# Altium PCB board.PcbDoc
Units mm, origin at the board's own origin, x right, y up, seen from the top; angles counter-clockwise.
Board outline 43 x 32 mm, 2 copper layers (Top Layer, Bottom Layer); 85 components, 64 nets, 306 pads, 137 vias.
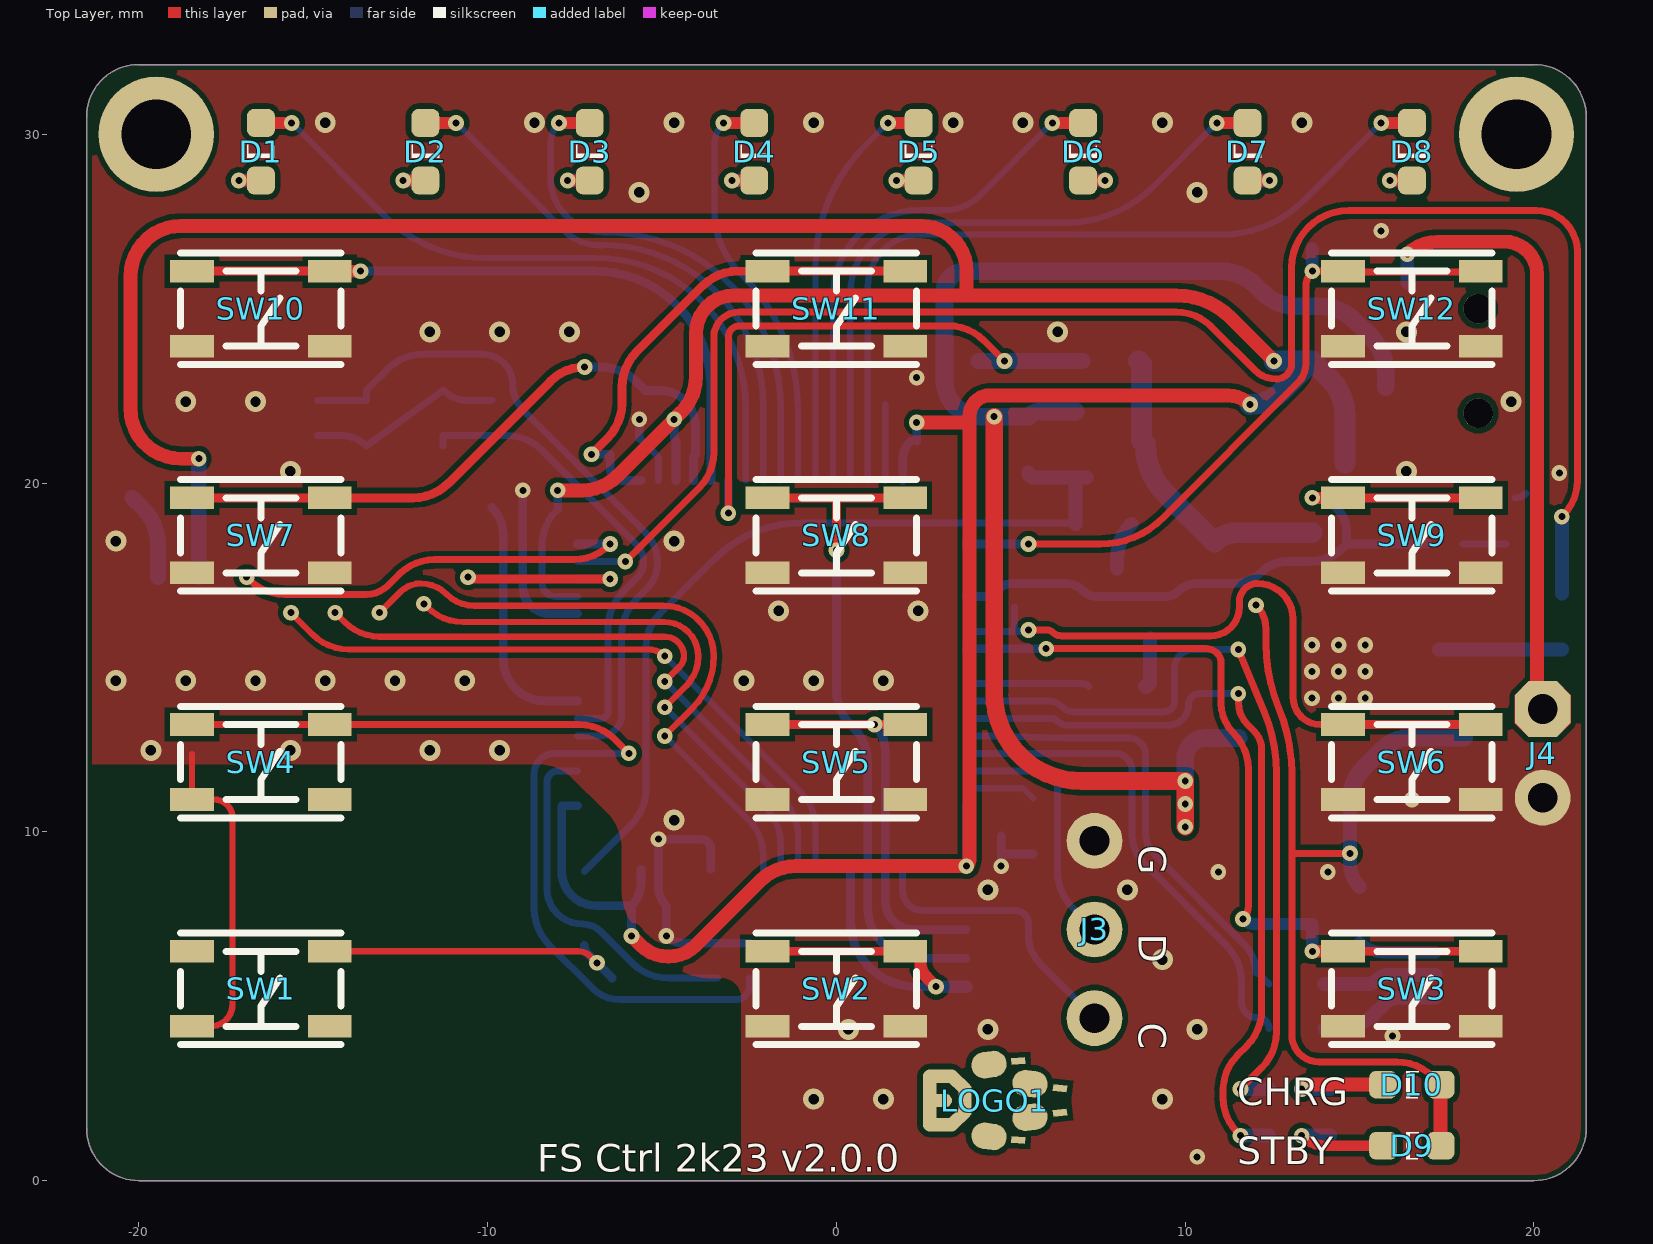
[diagram p0: Top Layer view]
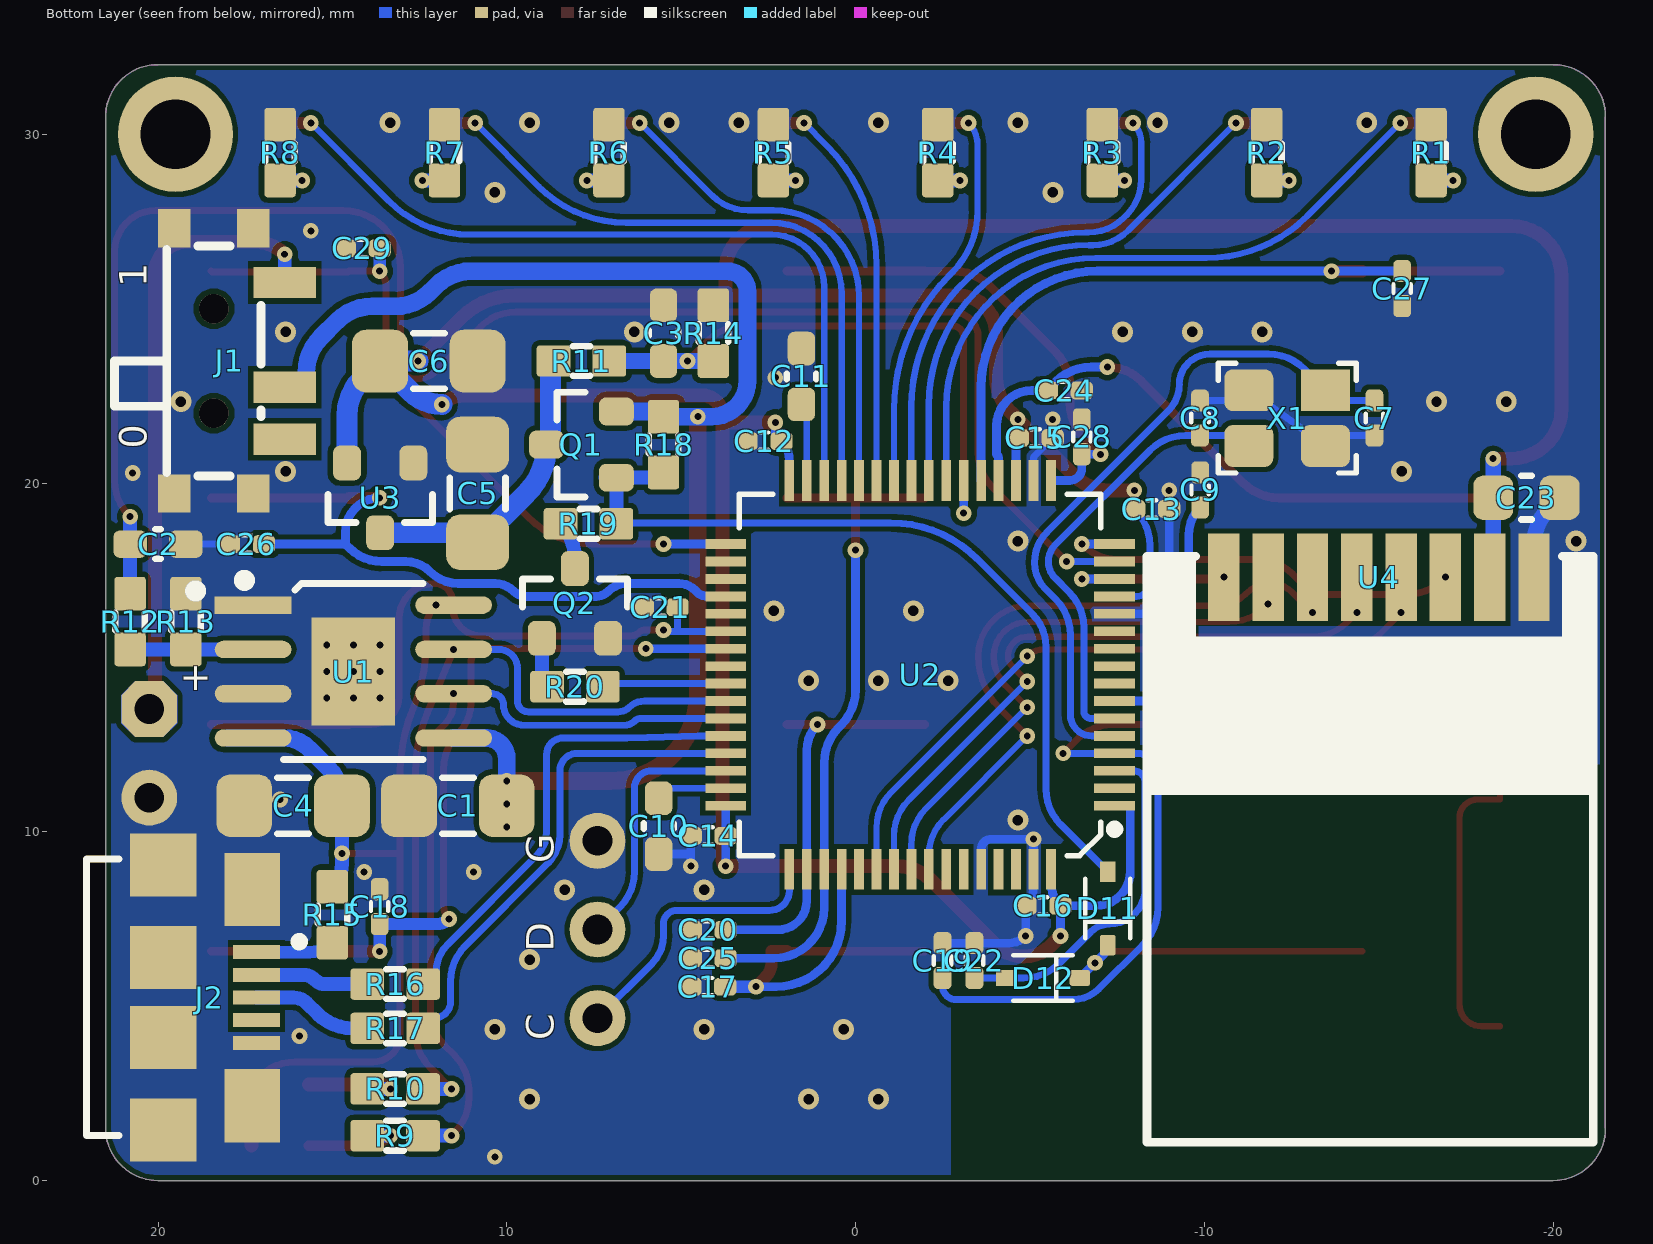
[diagram p1: Bottom Layer view, seen from below]
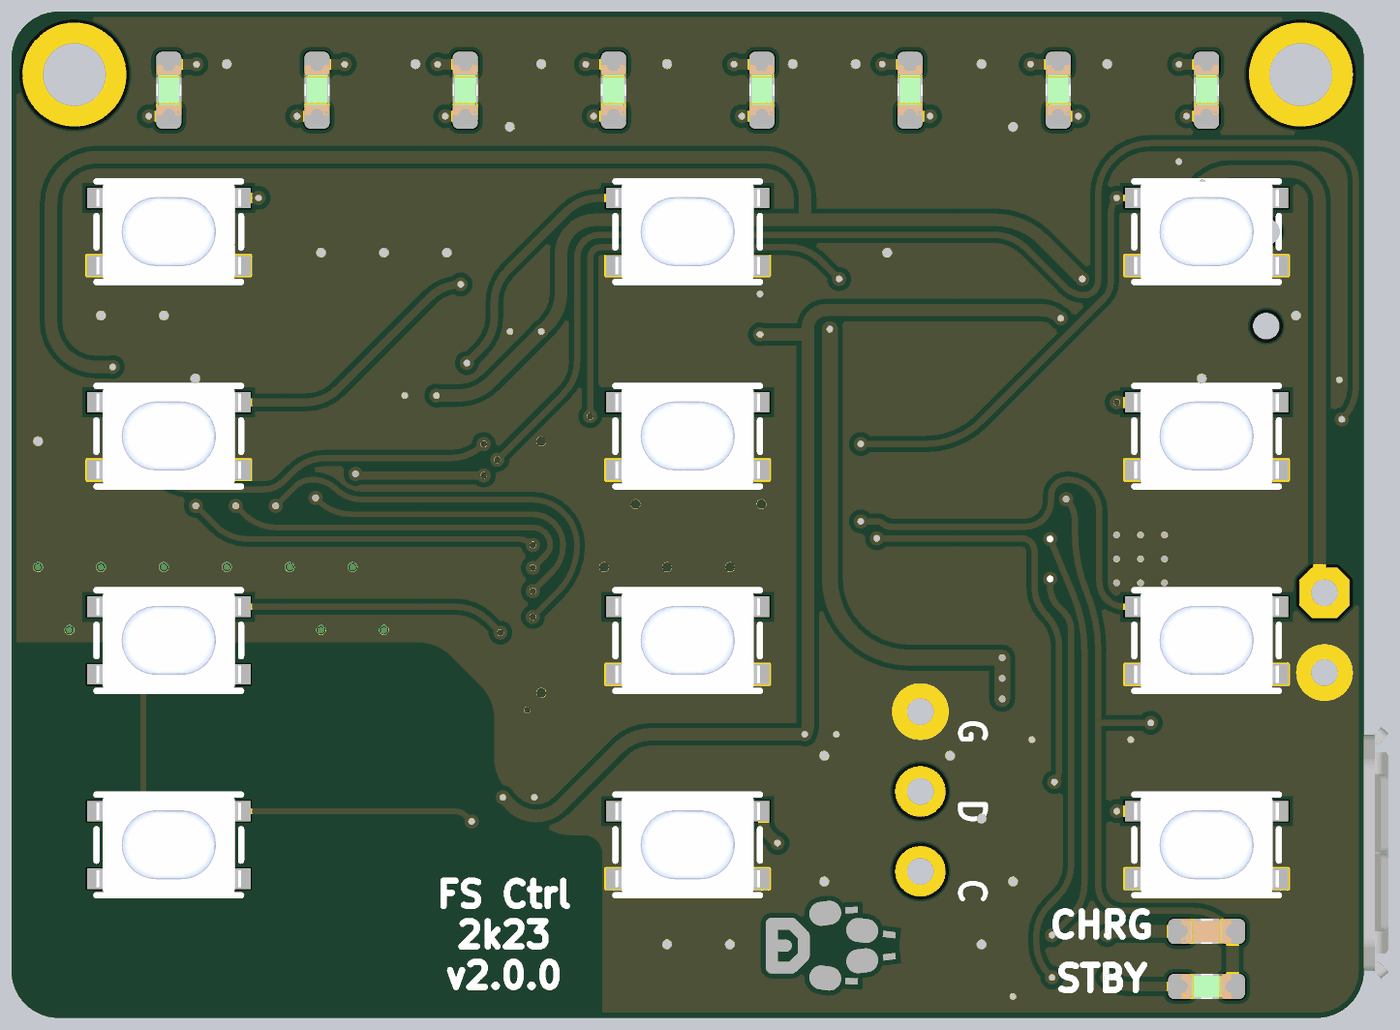
[diagram p2: 3D render of the assembled board from above, using the file's embedded part models]
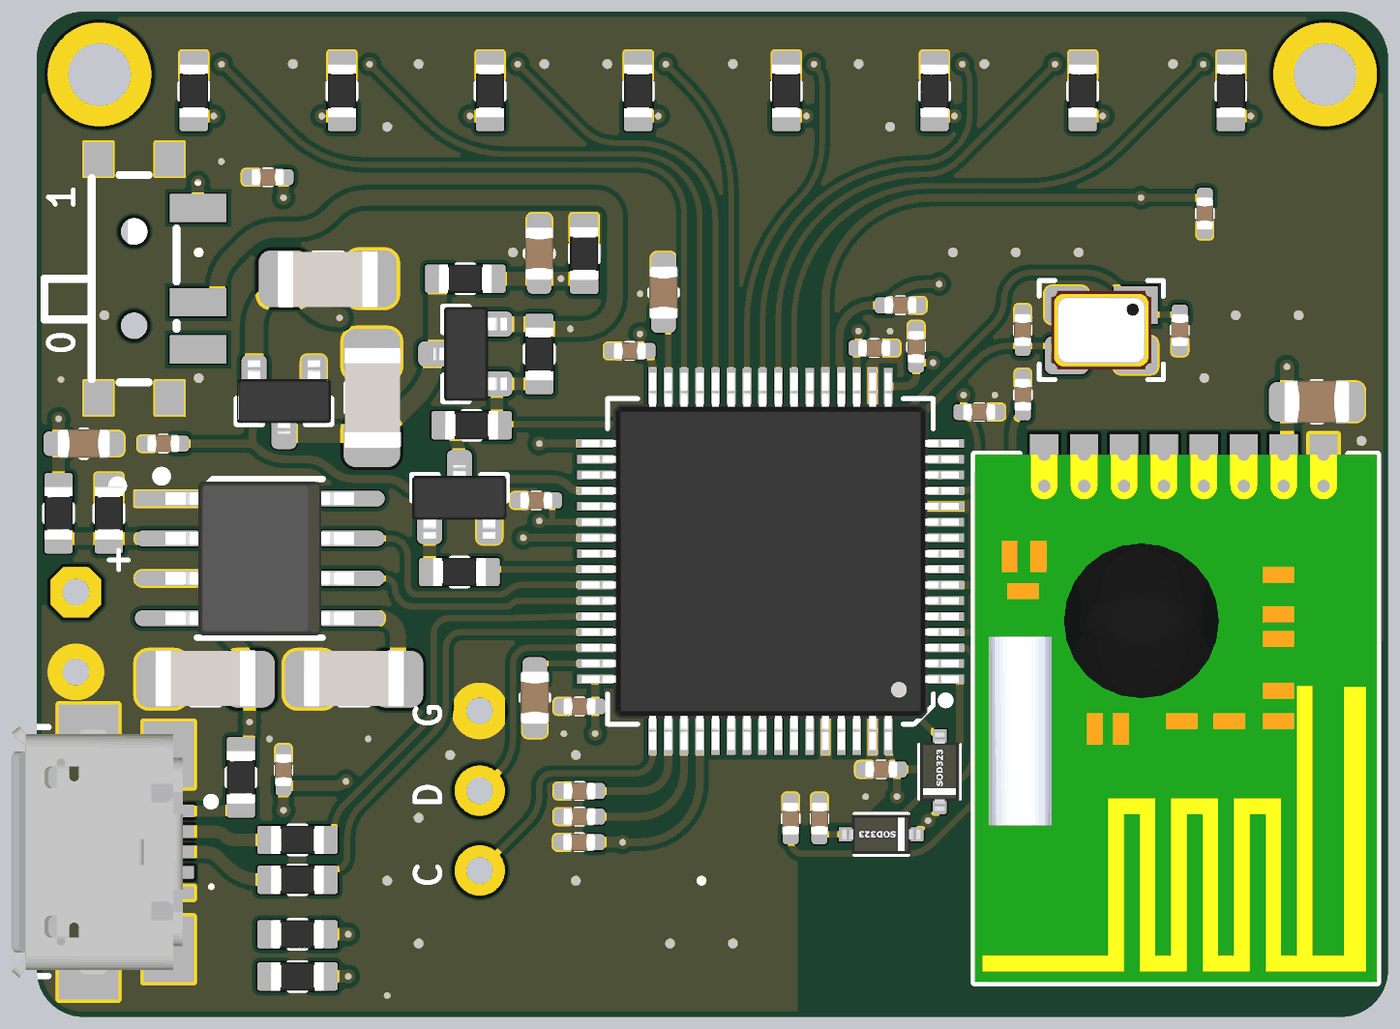
[diagram p3: 3D render of the assembled board from below, using the file's embedded part models]

## Layer stack, top to bottom
Top Solder: solder mask 0.0102, Solder Resist, Dk 3.5
Top Layer: signal copper 0.0356
Dielectric 1: dielectric 0.32, FR-4, Dk 4.8
Bottom Layer: signal copper 0.0356
Bottom Solder: solder mask 0.0102, Solder Resist, Dk 3.5

## Board outline
-21.5,1.5 -21.5,30.5 cw(c-20,30.5) -20,32 20,32 cw(c20,30.5) 21.5,30.5 21.5,1.5 cw(c20,1.5) 20,0 -20,0 cw(c-20,1.5)

## Design rules (kind name [scope] priority, off if disabled: settings)
Clearance Clearance_1 [InNet('ANT')] p1: gap=0.152 ignorepadtopadclearanceinfootprint=FALSE except(0.762: Arc-Fill Arc-Poly Arc-Region Track-Fill Track-Poly Track-Region SMDPad-Fill SMDPad-Poly SMDPad-Region THPad-Fill THPad-Poly THPad-Region Via-Fill Via-Poly Via-Region Fill-Fill Fill-Poly Fill-Region Poly-Poly Poly-Region Region-Region)
Clearance [All] p2: gap=0.152 ignorepadtopadclearanceinfootprint=FALSE
ComponentClearance [All] p1: gap=0.254 collisioncheckmode=3 verticalgap=0.254 showdistances=FALSE donotcheckwithout3dbody=TRUE
MinimumSolderMaskSliver [All] p1 off: minsoldermaskwidth=0.254
PolygonConnect [All] p1: connectstyle=Direct reliefconductorwidth=0.254 reliefentries=4 polygonreliefangle="90 Angle" airgapwidth=0.254
RoutingVias [All] p1 off: holewidth=0.711 width=1.27 viastyle="Through Hole" minholewidth=0.711 minwidth=1.27 maxholewidth=0.711 maxwidth=1.27
SilkToSilkClearance [All] p1 off: silktosilkclearance=0.254
SilkToSolderMaskClearance [IsPad] p1 off: minsilkscreentomaskgap=0.254 clearancetoexposedcopper=TRUE
SolderMaskExpansion [All] p1: expansion=0.102 istentingtop=FALSE
Width [All] p1: maxlimit=12.7 minlimit=0.051 preferedwidth=0.254
26 further rules are at their usual default settings.

## Components (designator, comment, footprint, x,y, rotation, side; value= is the part's Value field where it differs from the comment)
C1 "1u" C1206 11.401,10.75 r180 bottom
C2 "100n" C0603 20,18.25 r0 bottom
C3 "100n" C0603 5.507,24.299 r270 bottom
C4 "1u" C1206 16.126,10.75 r180 bottom
C5 "1u" C1206 10.836,19.703 r270 bottom
C6 "10u" C1206 12.236,23.499 r0 bottom
C7 "18pF" C0402 -14.875,21.862 r90 bottom
C8 "18pF" C0402 -9.875,21.862 r270 bottom
C9 "100n" C0402 -9.881,19.804 r270 bottom
C10 "2u2" C0603 5.647,10.163 r90 bottom
C11 "2u2" C0603 1.553,23.056 r270 bottom
C12 "100n" C0402 2.623,21.199 r180 bottom
C13 "100n" C0402 -8.491,19.255 r0 bottom
C14 "100n" C0402 4.226,9.884 r180 bottom
C15 "100n" C0402 -5.152,21.292 r0 bottom
C16 "100n" C0402 -5.376,7.88 r180 bottom
C17 "100n" C0402 4.237,5.559 r180 bottom
C18 "100n" C0402 13.644,7.856 r270 bottom
C19 "100n" C0402 -2.493,6.309 r270 bottom
C20 "100n" C0402 4.226,7.191 r180 bottom
C21 "100n" C0402 5.602,16.439 r180 bottom
C22 "100n" C0402 -3.408,6.309 r270 bottom
C23 "10uF" C0805 -19.234,19.58 r0 bottom
C24 "100n" C0402 -5.985,22.653 r0 bottom
C25 "100n" C0402 4.226,6.375 r180 bottom
C26 "100n" C0402 17.464,18.25 r180 bottom
C27 "100n" C0402 -15.672,25.575 r90 bottom
C28 "100n" C0402 -6.485,21.324 r270 bottom
C29 "100n" C0402 14.144,26.728 r180 bottom
D1 "GRN" LED-0603-GRN -16.5,29.5 r90 top
D2 "GRN" LED-0603-GRN -11.785,29.5 r90 top
D3 "GRN" LED-0603-GRN -7.071,29.5 r90 top
D4 "GRN" LED-0603-GRN -2.357,29.5 r90 top
D5 "GRN" LED-0603-GRN 2.358,29.5 r90 top
D6 "GRN" LED-0603-GRN 7.072,29.5 r90 top
D7 "GRN" LED-0603-GRN 11.786,29.5 r90 top
D8 "GRN" LED-0603-GRN 16.5,29.5 r90 top
D9 "GRN" LED-0603-GRN 16.5,1 r0 top
D10 "RED" LED-0603-RED 16.5,2.75 r0 top
D11 "" SOD-323 -7.229,7.804 r90 bottom
D12 "" SOD-323 -5.376,5.809 r0 bottom
J1 "MK-12C02-G025" SW-SMD_MK-12C02-G025 17.95,23.5 r270 bottom
J2 "MICROQTJ" CONN-USB-MICRO_#1 16.5,5.25 r0 bottom
J3 "SWD" HDR-1X3_2.54 7.4,7.2 r180 top
J4 "Header 2" HDR-1X2_2.54 20.25,12.25 r0 top
LOGO1 "LOGO" LOGO 2.674,2.297 r270 top
Q1 "IRLML6402" SOT-23 7.86,21.103 r180 bottom
Q2 "IRLML2502" SOT-23 8.046,16.549 r270 bottom
R1 "220" R0603 -16.5,29.475 r270 bottom
R2 "220" R0603 -11.785,29.475 r270 bottom
R3 "220" R0603 -7.071,29.475 r270 bottom
R4 "220" R0603 -2.357,29.475 r270 bottom
R5 "220" R0603 2.358,29.475 r270 bottom
R6 "220" R0603 7.072,29.475 r270 bottom
R7 "220" R0603 11.786,29.475 r270 bottom
R8 "220" R0603 16.5,29.475 r270 bottom
R9 "220" R0603 13.201,1.288 r0 bottom
R10 "220" R0603 13.201,2.629 r0 bottom
R11 "1M" R0603 7.86,23.499 r0 bottom
R12 "10k" R0603 20.8,16.03 r270 bottom
R13 "3k3" R0603 19.2,16.03 r270 bottom
R14 "470k" R0603 4.077,24.299 r270 bottom
R15 "0R47" R0603 15,7.625 r90 bottom
R16 "22" R0603 13.2,5.635 r180 bottom
R17 "22" R0603 13.2,4.364 r180 bottom
R18 "100k" R0603 5.507,21.103 r90 bottom
R19 "100" R0603 7.66,18.832 r180 bottom
R20 "100" R0603 8.046,14.161 r0 bottom
SW1 "PTS810SJS250" BTN_PTS810 -16.5,5.5 r0 top
SW2 "PTS810SJS250" BTN_PTS810 0,5.5 r0 top
SW3 "PTS810SJS250" BTN_PTS810 16.5,5.5 r0 top
SW4 "PTS810SJS250" BTN_PTS810 -16.5,12 r0 top
SW5 "PTS810SJS250" BTN_PTS810 0,12 r0 top
SW6 "PTS810SJS250" BTN_PTS810 16.5,12 r0 top
SW7 "PTS810SJS250" BTN_PTS810 -16.5,18.5 r0 top
SW8 "PTS810SJS250" BTN_PTS810 0,18.5 r0 top
SW9 "PTS810SJS250" BTN_PTS810 16.5,18.5 r0 top
SW10 "PTS810SJS250" BTN_PTS810 -16.5,25 r0 top
SW11 "PTS810SJS250" BTN_PTS810 0,25 r0 top
SW12 "PTS810SJS250" BTN_PTS810 16.5,25 r0 top
U1 "TP4056" PowerSOIC-8 14.4,14.595 r270 bottom
U2 "STM32F405RGT6" LQFP-64 -1.85,14.5 r90 bottom
U3 "XC6206P332MR" SOT-23 13.63,19.575 r90 bottom
U4 "RFM75" RFM75 -14.75,9.5 r0 bottom
X1 "12MHZ" CRYSTAL_3.2x2.5mm -12.375,21.863 r0 bottom

## Footprints (in the part's own frame and the unit in brackets; to place one, negate y for a bottom-side part, rotate by r counter-clockwise, add the part's x,y. Pads: shape width x height; smd on the part's side, far side on the other; paste and mask are expansions set on the pad)
BTN_PTS810 [mm]
  rect 1.25x0.65 smd mask+0.05: 1(-1.975,1.075) 2(1.975,1.075) 3(-1.975,-1.075) 4(1.975,-1.075)
  silkscreen extent -2.3,-1.6 2.3,1.6, body extent -2.3,-1.6 2.3,1.6, height 2.5
C0402 [mm] "Chip Capacitor Body"
  rrect50% 0.635x0.508 smd mask+0.05: 1(-0.5,0) 2(0.5,0)
  silkscreen extent -0.13,-0.25 0.13,0.25, body extent -0.52,-0.27 0.53,0.28, height 0.55
C0603 [mil] "Chip Capacitor"
  rrect50% 38x31 smd mask+1.97: 1(-31.5,0) 2(31.5,0)
  silkscreen extent -3,-17 3,17, body extent -33,-18 33,18, height 35
C0805 [mil] "Chip Capacitor"
  rrect50% 45x50 smd mask+1.97: 1(-37.5,0) 2(37.5,0)
  silkscreen extent -6,-25 6,25, body extent -41,-27 41,27, height 53
C1206 [mm] "Chip Capacitor"
  rrect50% 1.6x1.8 smd: 1(-1.4,0) 2(1.4,0)
  silkscreen extent -0.45,-0.8 0.45,0.8, body extent -1.6,-0.88 1.6,0.92, height 1.6
CONN-USB-MICRO_#1 [mm] "Connector; USB2.0, Type B, SM; 5 Position; Right Angle"
  rect 1.35x0.4 smd: 1(0.675,-1.3) 2(0.675,-0.65) 3(0.675,0) 4(0.675,0.65) 5(0.675,1.3)
  rect 1.6x2.1 smd: 6(0.8,-3.1) 6(0.8,3.1)
  rect 1.9x1.8 smd: 6(3.35,-3.8) 6(3.35,-1.15) 6(3.35,1.15) 6(3.35,3.8)
  silkscreen extent -0.67,-3.98 5.55,3.95, body extent 0.35,-3.99 5.78,3.99, height 2.69
CRYSTAL_3.2x2.5mm [mm]
  rect 1.4x1.2 smd mask+0.05: 1(-1.1,-0.8)
  rrect40% 1.4x1.2 smd mask+0.05: 2(-1.1,0.8) 3(1.1,0.8) 4(1.1,-0.8)
  silkscreen extent -1.97,-1.57 1.97,1.57, body extent -1.6,-1.25 1.6,1.25, height 0.82
HDR-1X2_2.54 [mm]
  oct 1.6x1.6 hole 0.85: 1(0,1.27)
  round 1.6 hole 0.85: 2(0,-1.27)
  Top Layer region: -0.4,0.47 -0.8,0.87 -0.8,1.67 -0.4,2.07 0.4,2.07 0.8,1.67 0.8,0.87 0.4,0.47
  Bottom Layer region: -0.4,0.47 -0.8,0.87 -0.8,1.67 -0.4,2.07 0.4,2.07 0.8,1.67 0.8,0.87 0.4,0.47
HDR-1X3_2.54 [mm]
  round 1.6 hole 0.85: 1(0,2.54) 2(0,0) 3(0,-2.54)
LED-0603-GRN [mm]
  rrect50% 0.8x0.8 smd mask+0.05: 1(0.825,0) 2(-0.825,0)
  silkscreen extent -0.18,-0.4 0.2,0.4, body extent -0.8,-0.4 0.8,0.4, height 0.6
LED-0603-RED [mm]
  rrect50% 0.8x0.8 smd paste+0 mask+0.05: 1(0.825,0) 2(-0.825,0)
  silkscreen extent -0.18,-0.4 0.2,0.4, body extent -0.8,-0.4 0.8,0.4, height 0.6
LOGO [mil]
  rect 15.75x7.87 smd rot 93 mask+4: ""(-44.55,100)
  oval 30x40 smd rot 8 mask+4: ""(-40.55,67)
  oval 15x39.5 smd mask+4: ""(-27.5,12.5) ""(27.5,12.5)
  oval 15x36.21 smd rot 135 mask+4: ""(-20,32.5)
  oval 30x40 smd rot 173 mask+4: ""(-18.99,113.27)
  rect 15.75x7.87 smd rot 83 mask+4: ""(-13.91,147.15)
  oval 39.5x15 smd mask+4: ""(0,40)
  oval 15x32.5 smd mask+4: ""(0,9)
  oval 70x15 smd mask+4: ""(0,0)
  rect 15.75x7.87 smd rot 97 mask+4: ""(13.91,147.15)
  oval 30x40 smd rot 7 mask+4: ""(18.99,113.27)
  oval 15x36.21 smd rot 45 mask+4: ""(20,32.5)
  oval 30x40 smd rot 172 mask+4: ""(40.55,67)
  rect 15.75x7.87 smd rot 87 mask+4: ""(44.55,100)
LQFP-64 [mil]
  rect 11x46 smd mask+0.98: 1(-147.64,-219.5) 2(-127.95,-219.5) 3(-108.27,-219.5) 4(-88.58,-219.5) 5(-68.9,-219.5) 6(-49.21,-219.5) 7(-29.53,-219.5) 8(-9.84,-219.5) 9(9.84,-219.5) 10(29.53,-219.5) 11(49.21,-219.5) 12(68.9,-219.5) 13(88.58,-219.5) 14(108.27,-219.5) 15(127.95,-219.5) 16(147.64,-219.5) 33(147.64,219.5) 34(127.95,219.5) 35(108.27,219.5) 36(88.58,219.5) 37(68.9,219.5) 38(49.21,219.5) 39(29.53,219.5) 40(9.84,219.5) 41(-9.84,219.5) 42(-29.53,219.5) 43(-49.21,219.5) 44(-68.9,219.5) 45(-88.58,219.5) 46(-108.27,219.5) 47(-127.95,219.5) 48(-147.64,219.5)
  rect 46x11 smd mask+0.98: 17(219.5,-147.64) 18(219.5,-127.95) 19(219.5,-108.27) 20(219.5,-88.58) 21(219.5,-68.9) 22(219.5,-49.21) 23(219.5,-29.53) 24(219.5,-9.84) 25(219.5,9.84) 26(219.5,29.53) 27(219.5,49.21) 28(219.5,68.9) 29(219.5,88.58) 30(219.5,108.27) 31(219.5,127.95) 32(219.5,147.64) 49(-219.5,147.64) 50(-219.5,127.95) 51(-219.5,108.27) 52(-219.5,88.58) 53(-219.5,68.9) 54(-219.5,49.21) 55(-219.5,29.53) 56(-219.5,9.84) 57(-219.5,-9.84) 58(-219.5,-29.53) 59(-219.5,-49.21) 60(-219.5,-68.9) 61(-219.5,-88.58) 62(-219.5,-108.27) 63(-219.5,-127.95) 64(-219.5,-147.64)
  silkscreen extent -204,-224 204,204, body extent -236,-236 236,236, height 59
PowerSOIC-8 [mm]
  rect 0.5x2.2 smd mask+0.05: 1(-1.905,-2.875)
  oval 0.5x2.2 smd mask+0.05: 2(-0.635,-2.875) 3(0.635,-2.875) 4(1.905,-2.875) 5(1.905,2.875) 6(0.635,2.875) 7(-0.635,2.875) 8(-1.905,2.875)
  rect 3.1x2.4 smd mask+0.05: 9(0,0)
  silkscreen extent -2.67,-4.57 2.52,2, body extent -2.45,-3 2.45,3, height 1.68
R0603 [mil] "Chip Resistor; Body 1.6 x 0.8 mm (LxW typ)"
  rrect20% 38x35.43 smd mask+1.97: 1(-31.5,0) 2(31.5,0)
  silkscreen extent -10,-17 10,17, body extent -33,-18 33,18, height 22
RFM75 [mm]
  rect 0.9x2.5 smd: 1(-4.7,-7.8) 2(-3.43,-7.8) 3(-2.16,-7.8) 4(-0.89,-7.8) 5(0.38,-7.8) 6(1.65,-7.8) 7(2.92,-7.8) 8(4.19,-7.8)
  silkscreen extent -6.4,-8.4 6.4,8.4, body extent -6.4,-8.4 6.4,8.4, height 3.01
SOD-323 [mm]
  rect 0.59x0.45 smd mask+0.05: 1(1.055,0)
  rrect30% 0.59x0.45 smd mask+0.05: 2(-1.055,0)
  silkscreen extent -0.85,-0.65 0.85,0.65, body extent -1.25,-0.63 1.25,0.62, height 0.99
SOT-23 [mm]
  rrect50% 1x0.8 smd mask+0.05: 1(1,-0.95) 2(1,0.95) 3(-1,0)
  silkscreen extent -0.7,-1.5 0.1,1.5, body extent -1.27,-1.5 1.33,1.5, height 1.1
SW-SMD_MK-12C02-G025 [mm]
  rect 0.9x1.8 smd paste+0 mask+0.051: 1(-2.25,1.583) 2(0.75,1.583) 3(2.25,1.583)
  rect 1.1x0.93 smd paste+0 mask+0.051: 4(3.8,0.687) 5(3.8,-1.583) 6(-3.8,-1.583) 7(-3.8,0.687)
  round 0.85 hole 0.85 unplated paste-2539.97: ""(-1.5,-0.448) ""(1.5,-0.448)
  silkscreen extent -3.3,-3.3 3.3,0.9, body extent -3.3,-3.3 3.3,0.9, height 1.4

## Part data
C1 C2 C3 C4 C5 C6 C9 C10 C11 C12 C13 C14 C15 C16 C17 C18 C19 C20 C21 C22 C24 C25 C26 C27 C28 C29: library part Cap
C7 C8: library part CAP, "18pF 0402"
C23: library part CAP
D1 D2 D3 D4 D5 D6 D7 D8 D9: library part LED-0603-GREEN, "LED 0603 GRN"
D10: library part LED-0603-RED, "LED 0603 RED"
D11 D12: library part US1M-13-F
J3: library part "Header 3"
Q1: library part 2N7002
Q2: library part 2N7002, "AOD4184"
R1 R2 R3 R4 R5 R6 R7 R8 R9 R10 R11 R13 R14 R18 R19 R20: library part Res1
R12 R15 R16 R17: library part RES
SW1 SW2 SW3 SW4 SW5 SW6 SW7 SW8 SW9 SW10 SW11 SW12: library part Component_1
U2: "MCU STM32F405RGT6"
U3: library part Component_4_1
X1: library part "CRYSTAL 12MHZ 3.20mm x 2.50mm", "X322512MOB4SI"

## Free pads (board coordinates)
  round 3.3 hole 2: M(-19.5,30) M(19.5,30)

## Via types
v1: diameter 0.45, hole 0.2, Top Layer to Bottom Layer, tented both sides, 90 vias
v2: diameter 0.6, hole 0.3, Top Layer to Bottom Layer, tented both sides, 47 vias

## Nets (pads, with @x,y where several pads share a name; then routed paths per layer and width w, separated by ;. In a path a pad name is that pad's centre, name@x,y a point inside that pad or via, vN(x,y) a via of type N, cw(c..) or ccw(c..) an arc to the next point about the centre after c; other vN are vias at no path point)
3V3: C6.2 C12.2 C13.2 C14.2 C15.2 C16.2 C23.2 U2.1 U2.13 U2.19 U2.32 U2.48 U2.64 U3.2 U4.2 | length 117.2
  Top Layer w0.4: -20.244,25.926 -20.244,22.145 ccw(c-18.796,22.145) -18.796,20.697 v1(-18.281,20.697) ; -20.239,25.926 cw(c-18.791,25.926) -18.791,27.374 ; -18.796,27.374 2.438,27.374 cw(c2.438,26.075) 3.736,26.075 3.736,25.381 ; v1(-7.991,19.791) -7.288,19.791 ccw(c-7.288,21.239) -6.264,20.216 v1(-4.652,21.828) -4.45,22.03 ccw(c-5.474,23.054) -4.026,23.054 -4.026,24.292 cw(c-2.937,24.292) -2.937,25.381 3.736,25.381 ; v1(-5.876,7.014) -5.611,6.749 ccw(c-4.82,7.54) -4.82,6.421 ccw(c-4.82,7.54) -4.029,6.749 ; -4.029,6.749 -2.185,8.593 cw(c-1.161,7.569) -1.161,9.017 v1(3.726,9.017) ccw(c3.502,9.241) 3.818,9.241 3.818,21.735 ; v1(2.301,21.735) 3.818,21.735 ; v1@11.861,22.251 ccw(c11.232,21.621) 11.232,22.511 4.394,22.511 ccw(c4.394,21.935) 3.818,21.935 3.818,21.735 ; v1(12.547,23.499) 11.317,24.729 ccw(c9.743,23.156) 9.744,25.381 3.736,25.381
  Bottom Layer w0.2: C13.2 -8.011,19.235 ccw(c-6.987,18.212) -8.435,18.212 -8.435,17.126 ccw(c-8.059,17.126) -8.059,16.75 U2.13
  Bottom Layer w0.25: C13.2 v1(-7.991,19.791) ; U2.1 -7.877,10.75 -7.877,8.874 ccw(c-6.883,8.874) -6.883,7.88 C16.2 ; v1(-5.876,7.014) C16.2 ; U2.64 -5.6,8.547 cw(c-6.543,8.547) C16.2 ; v1(-4.652,21.828) C15.2 cw(c-4.777,21.167) -4.6,21.167 U2.19 ; U2.32 1.9,20.661 cw(c2.661,20.661) C12.2 ; C12.2@2.301,21.199 v1(2.301,21.735) ; v1(3.726,9.017) C14.2 U2.48
  Bottom Layer w0.45: U4.2@-18.281,17.3 C23.2 v1(-18.281,20.697)
  Bottom Layer w0.6: v1(11.862,22.25) ccw(c11.862,23.521) 12.76,22.623 C6.2 ; v1(12.547,23.499) C6.2 ; U3.2 14.58,21.955 ccw(c13.133,21.955) 14.156,22.978 C6.2
5V: C4.2 D9.1 D10.1 R15.2 U1.4 U1.8 | length 27.6
  Top Layer w0.2: v1(12.033,16.5) cw(c11.344,15.811) 12.318,15.811 12.318,15.397 ccw(c17.168,15.397) 12.687,13.541 cw(c8.206,11.685) 13.056,11.685 13.056,9.384 ; v1(14.726,9.384) 13.056,9.384 ; D10.1 17.095,2.981 ccw(c16.071,1.957) 16.071,3.405 13.832,3.405 cw(c13.832,4.181) 13.056,4.181 13.056,9.384
  Top Layer w0.4: D9.1 D10.1
  Bottom Layer w0.4: C4.2 v1(14.726,9.384) 14.726,9.086 ccw(c15.662,9.086) R15.2
  Bottom Layer w0.5: C4.2 14.726,10.844 cw(c16.174,10.844) 15.15,11.867 15.673,12.39 ; 15.673,12.39 cw(c16.397,11.665) 16.397,12.69 U1.4 U1.4@18,12.69
ADC7: C3.2 R11.1 R14.2 U2.22 | length 17.4
  Top Layer w0.2: v1(-3.1,19.135) -3.1,24.183 cw(c-2.774,24.183) -2.774,24.509 3.207,24.509 cw(c3.207,23.061) 4.231,24.085 v1(4.817,23.499)
  Bottom Layer w0.254: v1(-3.1,19.135) U2.22
  Bottom Layer w0.45: R14.2 v1(4.817,23.499) C3.2 R11.1
BTN0: C22.2 D12.1 U2.3 | length 10.1
  Bottom Layer w0.2: U2.3 -7.967,11.75 ccw(c-7.967,11.415) -8.303,11.415 -8.303,8.374 ccw(c-7.284,8.374) -7.284,7.356 cw(c-7.284,6.589) -6.742,7.131 -5.844,6.233 ccw(c-4.82,7.257) -4.82,5.809 D12.1 C22.2
BTN0_IN: D11.2 D12.2 SW1.2 | length 8.8
  Top Layer w0.18: SW1.2 -7.414,6.575 cw(c-7.414,6.051) -7.044,6.421
  Bottom Layer w0.25: D11.2 ccw(c-6.886,6.749) -7.128,6.506 v1(-6.866,6.244) D12.2
BTN1: C17.2 SW2.1 SW2.2 U2.52 | length 11.5
  Top Layer w0.254: SW2.1 SW2.2
  Top Layer w0.35: SW2.2 2.414,6.575 2.414,6.227 ccw(c2.959,6.227) 2.573,5.842 v1(2.856,5.559)
  Bottom Layer w0.254: U2.52 0.4,7.444 ccw(c2.285,7.444) 2.285,5.559 v1(2.856,5.559)
  Bottom Layer w0.35: v1(2.856,5.559) C17.2
BTN2: C18.2 SW3.1 SW3.2 U2.39 | length 22.8
  Top Layer w0.2: v1(6.015,15.25) 10.616,15.25 cw(c10.616,14.835) 11.031,14.835 11.031,13.688 ccw(c12.247,13.688) 11.387,12.829 ; 11.387,12.828 cw(c10.363,11.805) 11.811,11.805 11.811,7.868 cw(c11.291,7.868) v1(11.659,7.5)
  Top Layer w0.254: SW3.1 SW3.2
  Top Layer w0.35: v1(13.644,6.575) SW3.1
  Bottom Layer w0.25: U2.39 v1(6.015,15.25)
  Bottom Layer w0.35: v1(11.659,7.5) ccw(c12.007,7.849) 12.007,7.356 C18.2 v1(13.644,6.575)
BTN3: C19.2 SW4.1 SW4.2 U2.4 | length 27.7
  Top Layer w0.2: SW4.1 SW4.2 -7.376,13.075 cw(c-7.376,11.627) -6.353,12.651 v1(-5.952,12.25)
  Bottom Layer w0.2: v1(-5.952,12.25) U2.4 -8.073,12.25 ccw(c-8.073,11.654) -8.669,11.654 -8.669,7.827 ccw(c-7.137,7.827) -8.221,6.743 -6.981,5.504 ccw(c-6.217,6.269) -6.217,5.187 -2.884,5.187 ccw(c-2.884,5.578) -2.493,5.578 C19.2
BTN4: C20.2 SW5.1 SW5.2 U2.50 | length 11.9
  Top Layer w0.254: SW5.1 v1(1.094,13.075) SW5.2
  Bottom Layer w0.25: v1(1.094,13.075) cw(c0.356,12.336) 1.4,12.336 U2.50 1.4,8.023 ccw(c2.232,8.023) 2.232,7.191 C20.2
BTN5: C21.2 SW6.1 SW6.2 U2.38 | length 19.7
  Top Layer w0.2: v1(5.507,15.788) 6.039,15.788 cw(c6.039,15.556) 6.203,15.72 ccw(c6.448,15.965) 6.448,15.619 10.732,15.619 ccw(c10.732,16.44) 11.554,16.44 11.554,16.599 cw(c12.075,16.599) 12.075,17.12 cw(c12.075,16.104) 13.091,16.104 13.091,13.862 ccw(c13.878,13.862) 13.878,13.075 SW6.1
  Top Layer w0.254: SW6.1 SW6.2
  Bottom Layer w0.2: U2.38 5.102,15.75 ; C21.2 5.102,15.75 ; v1(5.507,15.788) cw(c5.469,15.788) 5.469,15.75 5.102,15.75
BTN6: C24.2 SW7.1 SW7.2 U2.20 | length 18.2
  Top Layer w0.254: SW7.1 SW7.2 -12.14,19.575 ccw(c-12.14,21.023) -11.116,19.999 -8.193,22.922 cw(c-7.217,21.947) v1(-7.217,23.327)
  Bottom Layer w0.254: v1(-7.217,23.327) -6.758,23.327 cw(c-6.758,21.879) -5.735,22.903 C24.2 -5.049,22.653 cw(c-5.049,21.648) -4.044,21.648 -4.044,20.824 ccw(c-3.909,20.69) -4.1,20.69 U2.20
BTN7: C25.2 SW8.1 SW8.2 U2.51 | length 19.6
  Top Layer w0.254: SW8.1 0,19.575 ; v1(0,18.076) 0,19.575 ; SW8.2 0,19.575
  Bottom Layer w0.25: v1(0,18.076) 0,14.075 ccw(c1.448,14.075) 0.424,13.051 0.476,12.999 cw(c-0.547,11.975) 0.9,11.975 U2.51 0.9,7.823 ccw(c2.348,7.823) 2.348,6.375 C25.2
BTN8: C26.2 SW9.1 SW9.2 U2.36 | length 20.6
  Top Layer w0.254: SW9.1 SW9.2
  Top Layer w0.35: v1(13.644,19.575) SW9.1
  Bottom Layer w0.254: U2.36 4.242,16.75 ccw(c4.242,17.191) 4.554,16.879 4.595,16.921 cw(c5.077,16.439) 5.077,17.12 6.553,17.12 cw(c6.553,16.353) 7.096,16.895 ccw(c7.447,17.246) 7.447,16.75 9.448,16.75 ccw(c9.448,17.246) 9.799,16.895 cw(c10.342,16.353) 10.342,17.12 11.384,17.12 ccw(c11.384,18.273) 12.2,17.458 cw(c12.905,16.753) 12.905,17.75 13.582,17.75 ccw(c13.582,19.07) 14.515,18.137 14.629,18.25 ; v1(13.644,19.575) cw(c13.644,18.591) 14.456,19.148 cw(c13.644,18.591) 14.629,18.591 14.629,18.25 ; C26.2 14.629,18.25
BTN9: C27.2 SW10.1 SW10.2 U2.21 | length 21.5
  Top Layer w0.254: SW10.1 SW10.2
  Top Layer w0.35: SW10.2 v1(-13.644,26.075)
  Bottom Layer w0.254: C27.2 v1(-13.644,26.075) -6.928,26.075 cw(c-6.928,22.747) -3.6,22.747 U2.21
BTN10: C28.2 SW11.1 SW11.2 U2.17 | length 14
  Top Layer w0.25: v1(-7.021,20.824) -6.57,21.276 ccw(c-7.594,22.3) -6.146,22.3 -6.146,22.75 cw(c-4.698,22.75) -5.722,23.773 -3.844,25.651 cw(c-2.82,24.627) -2.82,26.075 SW11.1
  Top Layer w0.254: SW11.1 SW11.2
  Bottom Layer w0.25: v1(-7.021,20.824) C28.2 -6.485,20.421 ccw(c-6.139,20.421) -6.139,20.075 U2.17
BTN11: C29.2 SW12.1 SW12.2 U2.33 | length 20.1
  Top Layer w0.2: v1(5.507,18.25) 7.568,18.25 ccw(c7.568,20.761) 9.343,18.985 13.235,22.877 ccw(c12.692,23.42) 13.46,23.42 13.46,25.629 cw(c14.09,25.629) v1(13.644,26.075) SW12.1 14.553,26.047 18.447,26.047 SW12.2
  Bottom Layer w0.25: U2.33 v1(5.507,18.25)
  Bottom Layer w0.35: v1(13.644,26.075) C29.2
C\S\: U2.54 U4.4 | length 19
  Top Layer w0.18: v1(-15.64,16.284) -15.011,15.655 ccw(c-13.987,16.678) -13.987,15.231 -5.389,15.231 cw(c-5.389,14.569) v1(-4.922,15.037)
  Bottom Layer w0.18: v1(-4.922,15.037) -1.024,11.139 cw(c-2.047,10.115) -0.6,10.115 U2.54
CE: U2.16 U4.3 | length 11.9
  Top Layer w0.2: v1(-16.91,17.3) -16.842,17.232 ccw(c-15.818,18.256) -15.818,16.808 -13.468,16.808 ccw(c-13.468,17.665) -12.862,17.059 -12.539,17.381 cw(c-11.516,16.358) -11.516,17.805 -7.529,17.805 ccw(c-7.529,19.253) -6.506,18.229 v1(-6.485,18.25)
  Bottom Layer w0.254: U2.16 v1(-6.485,18.25)
CHRG: R10.1 U1.7 U2.42 | length 23.3
  Top Layer w0.2: v1(11.525,15.23) 12.268,13.438 cw(c8.033,11.684) 12.616,11.684 12.616,4.26 cw(c11.169,4.26) 12.192,3.237 v1(11.585,2.629)
  Bottom Layer w0.2: U2.42 6.057,13.75 cw(c6.057,13.137) 6.491,13.57 ccw(c6.807,13.886) 6.807,13.439 9.383,13.439 ccw(c9.383,13.75) 9.693,13.75 9.693,14.688 cw(c10.235,14.688) 10.235,15.23 v1(11.525,15.23)
  Bottom Layer w0.4: v1(11.585,2.629) R10.1
CUR_MON: C2.2 R12.1 U2.15 | length 49.2
  Top Layer w0.2: v1(-6.05,17.75) -3.939,19.861 ccw(c-4.962,20.885) -3.515,20.885 -3.515,24.183 cw(c-2.794,24.183) -2.794,24.903 9.734,24.903 cw(c9.734,23.455) 10.758,24.479 12.004,23.233 ccw(c12.608,23.837) 12.608,22.983 ccw(c12.608,23.425) 13.05,23.425 13.05,26.17 cw(c14.696,26.17) 14.696,27.816 20.066,27.816 cw(c20.066,26.636) 21.245,26.636 21.245,20.08 cw(c19.797,20.08) 20.821,19.057 v1(20.8,19.036)
  Bottom Layer w0.2: U2.15 v1(-6.05,17.75)
  Bottom Layer w0.4: R12.1 C2.2 v1(20.8,19.036)
DM: R16.2 U2.44 | length 13.4
  Bottom Layer w0.2: U2.44 4.522,12.75 5.968,12.708 6.553,12.691 8.389,12.691 cw(c8.389,12.221) 8.86,12.221 8.86,9.991 ccw(c9.78,9.991) 9.129,9.34 11.693,6.776 cw(c10.873,5.955) 12.033,5.955 cw(c12.033,5.841) 12.114,5.922 R16.2
DP: R17.2 U2.45 | length 14.1
  Bottom Layer w0.2: U2.45 7.979,12.25 cw(c7.979,11.75) 8.479,11.75 8.479,9.92 ccw(c9.632,9.92) 8.816,9.105 11.191,6.73 cw(c10.167,5.707) 11.615,5.707 11.615,5.117 ccw(c12.058,5.117) 12.058,4.674 12.09,4.674 cw(c12.09,4.364) R17.2
GND: C1.1 C2.1 C3.1 C4.1 C5.1 C6.1 C7.1 C8.1 C9.1 C10.1 C11.1 C12.1 C13.1 C14.1 C15.1 C16.1 C17.1 C18.1 C19.1 C20.1 C21.1 C22.1 C23.1 C24.1 C25.1 C26.1 C27.1 C28.1 C29.1 J1.4 J1.5 J1.6 J1.7 J2.5 J2.6 J3.3 J4.2 Q2.2 R1.1 R2.1 R3.1 R4.1 R5.1 R6.1 R7.1 R8.1 R13.1 R14.1 SW1.3 SW2.3 SW2.4 SW3.3 SW3.4 SW4.3 SW5.3 SW5.4 SW6.3 SW6.4 SW7.3 SW7.4 SW8.3 SW8.4 SW9.3 SW9.4 SW10.3 SW10.4 SW11.3 SW11.4 SW12.3 SW12.4 U1.1 U1.3 U1.9 U2.12 U2.18 U2.60 U2.63 U3.1 U4.1 X1.2 X1.4 | length 35.5
  Top Layer w0.18: SW1.3 -17.947,4.425 ccw(c-17.947,5.06) -17.312,5.06 -17.312,10.4 ccw(c-17.837,10.4) -17.837,10.925 SW4.3 -18.475,12.231
  Bottom Layer w0.203: C7.1 -14.199,21.362 cw(c-14.199,20.338) X1.2 X1.4 ccw(c-10.55,23.387) -10.55,22.362 C8.1 ; C15.1 -5.131,20.772 cw(c-5.208,20.695) -5.1,20.695 U2.18 ; C26.1 C2.1 ; J1.5@19.462,19.575 ccw(c19.462,20.002) J1.5@19.764,19.7
  Bottom Layer w0.25: v1(-8.991,19.791) C13.1 -8.991,17.033 ccw(c-8.208,17.033) -8.208,16.25 U2.12 ; C15.1 v1(-5.652,21.828) ; U2.60 -3.6,9.496 ccw(c-3.894,9.496) -3.894,9.791 v1(-5.1,9.791) U2.63 -5.1,8.42 ccw(c-4.336,8.42) C16.1 v1(-4.876,7.014) ccw(c-4.381,7.508) -4.381,6.809 C22.1 C19.1 ; v1(4.726,9.017) 4.726,9.363 ; C14.1 4.726,9.363 ; C10.1 4.726,9.363
  Bottom Layer w0.45: C23.1 -19.874,19.267 cw(c-20.898,18.244) -19.45,18.244 U4.1
  other v1: 10.344,0.68 15.943,4.145 10.949,8.847 14.09,8.847 16.5,10.925 13.638,13.833 14.4,13.833 15.162,13.833 13.638,14.595 14.4,14.595 15.162,14.595 13.638,15.357 14.4,15.357 15.162,15.357 20.725,20.289 2.301,23.02 15.619,27.23
  other v2: -0.656,2.335 1.344,2.335 9.344,2.335 0.344,4.335 4.344,4.335 10.344,4.335 9.344,6.335 4.344,8.335 8.344,8.335 -4.656,10.335 -19.656,12.335 -15.656,12.335 -11.656,12.335 -9.656,12.335 -20.656,14.335 -18.656,14.335 -16.656,14.335 -14.656,14.335 -12.656,14.335 -10.656,14.335 -2.656,14.335 -0.656,14.335 1.344,14.335 -1.656,16.335 2.344,16.335 -20.656,18.335 -4.656,18.335 -15.656,20.335 16.344,20.335 -18.656,22.335 -16.656,22.335 19.344,22.335 -11.656,24.335 -9.656,24.335 -7.656,24.335 6.344,24.335 16.344,24.335 -5.656,28.335 10.344,28.335 -14.656,30.335 -8.656,30.335 -4.656,30.335 -0.656,30.335 3.344,30.335 5.344,30.335 9.344,30.335 13.344,30.335
I\R\Q\: U2.14 U4.8 | length 5
  Top Layer w0.254: v1(-10.56,17.3) ccw(c-10.439,17.421) -10.439,17.25 v1(-6.485,17.25)
  Bottom Layer w0.254: U2.14 v1(-6.485,17.25)
LED0: D1.1 U2.23 | length 19.9
  Top Layer w0.35: D1.1 v1(-15.619,30.325)
  Bottom Layer w0.18: v1(-15.619,30.325) -12.942,27.648 ccw(c-10.059,30.531) -10.059,26.454 -6.878,26.454 cw(c-6.878,22.176) -2.6,22.176 U2.23
LED1: D2.1 U2.24 | length 15.9
  Top Layer w0.35: D2.1 v1(-10.904,30.325)
  Bottom Layer w0.18: v1(-10.904,30.325) -7.825,27.246 ccw(c-6.801,28.27) -6.801,26.822 -6.689,26.822 cw(c-6.689,22.232) -2.1,22.232 U2.24
LED2: D3.1 U2.25 | length 15
  Top Layer w0.35: v1(-7.952,30.325) D3.1
  Bottom Layer w0.18: v1(-7.952,30.325) ccw(c-7.377,29.75) -8.19,29.75 -8.19,28.705 ccw(c-6.742,28.705) -7.766,27.681 -7.692,27.607 ccw(c-6.668,28.63) -6.668,27.182 -6.602,27.182 cw(c-6.602,22.18) -1.6,22.18 U2.25
LED3: D4.1 U2.26 | length 11.8
  Top Layer w0.35: v1(-3.238,30.325) D4.1
  Bottom Layer w0.18: v1(-3.238,30.325) ccw(c-2.612,29.699) -3.497,29.699 -3.497,27.801 ccw(c-0.989,27.801) -2.762,26.027 -2.707,25.972 cw(c-6.587,22.092) -1.1,22.092 U2.26
LED4: D5.1 U2.27 | length 11.8
  Top Layer w0.35: v1(1.477,30.325) D5.1
  Bottom Layer w0.18: U2.27 -0.6,26.234 cw(c4.264,26.234) 0.825,29.673 v1(1.477,30.325)
LED5: D6.1 U2.28 | length 14.8
  Top Layer w0.35: v1(6.191,30.325) D6.1
  Bottom Layer w0.18: U2.28 -0.1,25.355 cw(c2.364,25.355) 2.364,27.818 3.084,27.818 ccw(c3.084,29.266) 4.108,28.242 v1(6.191,30.325)
LED6: D7.1 U2.29 | length 18.9
  Top Layer w0.35: v1(10.905,30.325) D7.1
  Bottom Layer w0.18: U2.29 0.4,25.451 cw(c2.415,25.451) 2.415,27.465 6.585,27.465 ccw(c6.585,30.992) 9.079,28.498 v1(10.905,30.325)
LED7: D8.1 U2.30 | length 23.2
  Top Layer w0.35: v1(15.619,30.325) D8.1
  Bottom Layer w0.18: U2.30 0.9,25.618 cw(c2.407,25.618) 2.407,27.124 11.061,27.124 ccw(c11.061,30.402) 13.379,28.084 v1(15.619,30.325)
MISO: U2.56 U4.7 | length 16.4
  Top Layer w0.18: v1(-11.83,16.538) -11.732,16.44 ccw(c-10.709,17.464) -10.709,16.016 -4.935,16.016 cw(c-4.935,15.044) -3.962,15.044 -3.962,15.011 cw(c-5.125,15.011) -4.303,14.189 v1(-4.922,13.57)
  Bottom Layer w0.18: v1(-4.922,13.57) -2.024,10.672 cw(c-3.047,9.648) -1.6,9.648 U2.56
MOSI: U2.57 U4.6 | length 18.8
  Top Layer w0.18: v1@-12.942,16.442 v1(-13.1,16.284) -12.508,16.876 cw(c-11.918,16.286) -11.918,17.12 cw(c-11.918,16.078) -11.181,16.815 ccw(c-10.384,17.613) -10.384,16.485 -4.962,16.485 cw(c-4.962,15.037) -3.515,15.037 cw(c-5.638,15.037) -4.137,13.535 v1(-4.922,12.75)
  Bottom Layer w0.18: v1(-4.922,12.75) -2.524,10.352 cw(c-3.547,9.328) -2.1,9.328 U2.57
NetC7_2: C7.2 U2.5 X1.1 | length 19.8
  Bottom Layer w0.2: C7.2 -13.475,22.362 X1.1 -12.863,23.274 cw(c-11.84,22.25) -11.84,23.698 -10.156,23.698 cw(c-10.156,22.823) -9.28,22.823 ccw(c-8.223,22.823) -8.971,22.075 -5.493,18.597 cw(c-6.369,17.721) -5.13,17.721 cw(c-6.208,17.721) -5.445,16.959 -5.734,16.67 ccw(c-4.71,15.646) -6.158,15.646 -6.158,13.363 cw(c-6.771,13.363) -6.771,12.75 U2.5
NetC8_2: C8.2 U2.6 X1.3 | length 13.2
  Bottom Layer w0.2: X1.3 -11.275,21.363 C8.2 ; C8.2 -9.458,21.362 cw(c-9.458,19.915) -8.435,20.938 -5.729,18.233 cw(c-6.215,17.747) -5.528,17.747 cw(c-6.202,17.747) -5.726,17.271 -6.119,16.877 ccw(c-5.096,15.853) -6.543,15.853 -6.543,13.455 cw(c-6.748,13.455) -6.748,13.25 U2.6
NetC9_2: C9.2 U2.7 | length 7.3
  Bottom Layer w0.25: C9.2@-9.881,19.303 cw(c-10.68,18.505) -9.55,18.505 -9.55,14.95 ccw(c-8.35,14.95) -8.35,13.75 U2.7
NetC10_2: C10.2 U2.47 | length 2
  Bottom Layer w0.18: U2.47 5.36,11.25 C10.2
NetC11_2: C11.2 U2.31 | length 2.2
  Bottom Layer w0.2: U2.31 C11.2@1.4,22.256
NetD1_2: D1.2 R1.2 | length 1.2
  Top Layer w0.35: v1(-17.135,28.675) D1.2
  Bottom Layer w0.4: v1(-17.135,28.675) R1.2@-16.528,28.675
NetD2_2: D2.2 R2.2 | length 1.2
  Top Layer w0.35: v1(-12.42,28.675) D2.2
  Bottom Layer w0.4: v1(-12.42,28.675) R2.2@-11.814,28.675
NetD3_2: D3.2 R3.2 | length 1.2
  Top Layer w0.35: v1(-7.706,28.675) D3.2
  Bottom Layer w0.4: v1(-7.706,28.675) R3.2@-7.1,28.675
NetD4_2: D4.2 R4.2 | length 1.2
  Top Layer w0.35: v1(-2.992,28.675) D4.2
  Bottom Layer w0.4: v1(-2.992,28.675) R4.2@-2.385,28.675
NetD5_2: D5.2 R5.2 | length 1.3
  Top Layer w0.35: v1(1.723,28.675) D5.2
  Bottom Layer w0.4: v1(1.723,28.675) R5.2
NetD6_2: D6.2 R6.2 | length 1.2
  Top Layer w0.35: D6.2 v1(7.707,28.675)
  Bottom Layer w0.4: R6.2@7.1,28.675 v1(7.707,28.675)
NetD7_2: D7.2 R7.2 | length 1.2
  Top Layer w0.35: D7.2 v1(12.421,28.675)
  Bottom Layer w0.4: R7.2@11.815,28.675 v1(12.421,28.675)
NetD8_2: D8.2 R8.2 | length 1.2
  Top Layer w0.35: v1(15.865,28.675) D8.2
  Bottom Layer w0.4: v1(15.865,28.675) R8.2@16.472,28.675
NetD9_2: D9.2 R9.2 | length 3.2
  Top Layer w0.3: v1(13.338,1.288) ccw(c14.032,1.982) 14.032,1 D9.2
  Bottom Layer w0.4: v1(13.338,1.288) R9.2 R9.2@14.153,1.288
NetD10_2: D10.2 R10.2 | length 3.2
  Top Layer w0.4: v1(13.338,2.629) cw(c13.629,2.338) 13.629,2.75 D10.2
  Bottom Layer w0.4: v1(13.338,2.629) R10.2 R10.2@14.153,2.629
NetD11_1: D11.1 Q1.1 R18.1 R19.2 | length 24
  Bottom Layer w0.2: D11.1 -5.882,10.205 ccw(c-6.906,11.229) -5.458,11.229 -5.458,15.306 cw(c-4.13,15.306) -5.069,16.245 -3.482,17.833 cw(c-1.004,15.354) -1.004,18.859 6.795,18.859 cw(c6.795,18.768) R19.2
  Bottom Layer w0.4: R18.1 ccw(c5.657,20.303) 5.657,20.153 Q1.1 Q1.1@7.167,20.153 ; R19.2 Q1.1@6.86,20.055
NetJ2_1: J2.1 R15.1 | length 2.2
  Bottom Layer w0.35: R15.1 ccw(c15.663,7.487) 15.663,6.55 J2.1
NetJ2_2: J2.2 R16.1 | length 3.2
  Bottom Layer w0.4: R16.1 15.205,5.635 ccw(c15.205,6.063) 15.507,5.76 cw(c15.845,5.423) 15.845,5.9 J2.2
NetJ2_3: J2.3 R17.1 | length 3.5
  Bottom Layer w0.4: R17.1 14.407,4.364 ccw(c14.407,5.811) 15.43,4.788 15.723,5.08 cw(c16.133,4.67) 16.133,5.25 J2.3
NetQ2_1: Q2.1 R20.2 | length 1.5
  Bottom Layer w0.4: R20.2 ccw(c8.846,14.311) 8.996,14.311 Q2.1
NetQ2_3: Q2.3 R19.1 | length 1.4
  Bottom Layer w0.4: Q2.3 8.046,17.834 cw(c9.458,17.834) R19.1
NetR12_2: R12.2 R13.2 U1.2 | length 3.5
  Bottom Layer w0.4: U1.2 R13.2 R12.2
PWR_ON: R20.1 U2.41 | length 3.5
  Bottom Layer w0.2: U2.41 7.031,14.25 cw(c7.031,13.946) R20.1
SCK: U2.55 U4.5 | length 18.4
  Top Layer w0.18: v1(-14.37,16.284) -14.106,16.02 ccw(c-13.082,17.044) -13.106,15.596 ccw(c-13.082,17.044) -13.082,15.596 -4.929,15.596 cw(c-4.929,15.037) -4.37,15.037 cw(c-4.789,15.037) -4.493,14.74 v1(-4.922,14.311)
  Bottom Layer w0.18: v1(-4.922,14.311) -1.524,10.913 cw(c-2.547,9.889) -1.1,9.889 U2.55
STBY: R9.1 U1.6 U2.43 | length 22.5
  Top Layer w0.2: v1(11.525,13.96) 11.525,13.705 ccw(c12.416,13.705) 11.786,13.075 11.967,12.894 cw(c11.418,12.346) 12.194,12.346 12.194,4.889 cw(c10.746,4.889) 11.77,3.865 11.502,3.597 ccw(c12.508,2.592) 11.091,2.712 ccw(c12.508,2.592) 11.086,2.592 11.086,2.387 ccw(c12.533,2.387) 11.51,1.363 v1(11.585,1.288)
  Bottom Layer w0.2: U2.43 6.155,13.25 cw(c6.155,12.987) 6.341,13.173 ccw(c6.623,13.455) 6.623,13.056 9.507,13.056 ccw(c9.507,13.646) 10.096,13.646 cw(c10.411,13.646) 10.411,13.96 v1(11.525,13.96)
  Bottom Layer w0.4: v1(11.585,1.288) R9.1
SWCLK: J3.1 U2.49 | length 8.2
  Bottom Layer w0.2: U2.49 1.9,8.309 ccw(c2.465,8.309) 2.465,7.745 5.131,7.745 cw(c5.131,7.369) 5.507,7.369 5.507,7.027 ccw(c6.654,7.027) 5.843,6.217 J3.1
SWDIO: J3.2 U2.46 | length 7.3
  Bottom Layer w0.2: U2.46 5.841,11.75 cw(c5.841,11.25) 6.341,11.25 6.341,8.859 ccw(c7.789,8.859) 6.765,7.835 J3.2
VB: J1.1 J4.1 | length 17.7
  Top Layer w0.4: v1(16.367,26.56) cw(c17.232,25.695) 17.232,26.918 19.166,26.918 cw(c19.166,25.992) 20.091,25.992 20.091,13.679 ccw(c20.25,13.679) J4.1
  Bottom Layer w0.4: J1.1 v1(16.367,26.56)
VBAT: C1.2 J1.2 Q1.2 R18.2 U1.5 | length 41
  Top Layer w0.508: v1(4.522,21.903) 4.522,13.972 ccw(c7.038,13.972) 7.038,11.456 v1(10.001,11.456) v1(10.001,10.799) v1(10.001,10.142)
  Bottom Layer w0.508: Q1.2 5.869,22.053 ccw(c5.869,21.541) R18.2 v1(4.522,21.903) 4.129,21.903 cw(c4.129,22.933) 3.099,22.933 3.099,25.491 cw(c3.683,25.491) 3.683,26.075 11.017,26.075 cw(c11.017,24.653) 12.023,25.658 12.2,25.482 ccw(c13.205,26.487) 13.205,25.065 13.849,25.065 cw(c13.849,23.617) 14.873,24.641 15.325,24.189 cw(c14.301,23.165) 15.749,23.165 J1.2@15.749,22.745 ; C1.2 v1(10.001,10.799) v1(10.001,11.456) 10.001,12.099 cw(c10.592,12.099) 10.592,12.69 U1.5
VSYS: C5.2 Q1.3 R11.2 U3.3 | length 8.9
  Bottom Layer w0.6: R11.2 8.748,23.41 8.748,21.214 Q1.3 ccw(c10.847,21.103) 9.442,19.698 C5.2 cw(c11.493,17.646) 11.493,18.575 U3.3
pads on no net: J1. J1.3 J2.4 LOGO1. SW1.1 SW1.4 SW4.4 U2.2 U2.8 U2.9 U2.10 U2.11 U2.34 U2.35 U2.37 U2.40 U2.53 U2.58 U2.59 U2.61 U2.62

## Polygon pours and split planes (outlines as drawn)
GND on Top Layer "NONET_L02_P-001" (solid, remove dead copper, pour order 0): -21.5,0 21.5,0 21.5,32 -21.5,32
GND on Bottom Layer "NONET_L02_P-001" (solid, remove dead copper, pour order 1): -21.5,0 21.5,0 21.5,32 -21.5,32

## Keep-outs
Keep-Out Layer:
  the board outline again, w0.001

## Other copper
Multi-Layer:
  pour cut-out: -5.728,7.229 cw(c-4.704,8.253) -6.152,8.253 -6.152,9.52 ccw(c-7.6,9.52) -6.576,10.543 -7.547,11.514 ccw(c-8.57,10.49) -8.57,11.938 -9.829,11.938 -22.098,11.938 -22.098,-1.676 -2.722,-1.676 -2.722,5.223 ccw(c-3.308,5.223) -3.308,5.809 -3.708,5.809 cw(c-3.708,7.257) -4.732,6.233

## Silkscreen, mask and mechanical layers (free items; w line width, h text height)
Top Overlay:
  text "G" at 8.664,9.613 h0.8 r270
  text "D" at 8.664,7.073 h0.8 r270
  text "C" at 8.664,4.533 h0.8 r270
  text "CHRG" at 11.496,2.164 h0.8
  text "STBY" at 11.496,0.464 h0.8
  text "FS Ctrl 2k23 v2.0.0" at -8.57,0.257 h0.8
Bottom Overlay:
  text "1" at 20.328,25.617 h0.8 r270
  text "0" at 20.328,20.984 h0.8 r270
  text "+" at 18.576,13.951 h0.8 r270
  text "G" at 8.657,9.102 h0.8 r270
  text "D" at 8.657,6.562 h0.8 r270
  text "C" at 8.657,4.022 h0.8 r270

## Text inside footprints (layer, text, board x,y; h text height)
J2: Mechanical 1 "PCB Edge" at 21.725,8.95 h0.25 r90